# EAGLE board WaterProbe_2 (EAGLE 9.1.3)
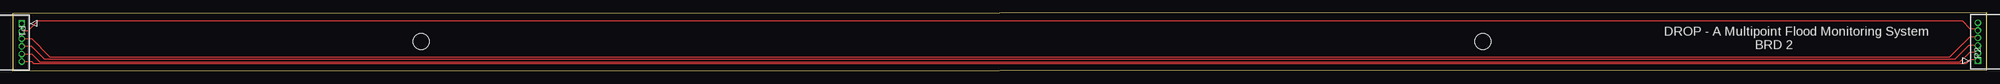
[diagram p0: board, top side]

Size 386.74 x 11.46 mm. Coordinates in mm from the lower left corner, seen from the top.
Outline: 0,0 386.74,0.21 386.74,11.46 0,11.25 0,0
Copper layers (1*16): Top 0.035mm / dielectric 1.5mm / Bottom 0.035mm
Design rules "default": minimum track width 6mil, minimum drill 0.35mm, track to track 6mil, track to pad 6mil, pad to pad 6mil, via to via 6mil, smd to smd 6mil, copper to edge 40mil, drill to drill 6mil, minimum pad ring 10mil, minimum via ring 8mil, stop-mask expansion 4mil, vias tented up to drill 0mil, thermal gap 10mil
Holes 3.2 mm at 80,5.75 288,5.75

## Footprints (pad centres in the part's own frame; a part is rotated, then mirrored left to right if it is on the bottom)
S6B-ZR = drill 0.762 pad 1.27 square: 1 -7.493,0 | drill 0.762 pad 1.27: 2 -5.994,0; 3 -4.496,0; 4 -2.997,0; 5 -1.499,0; 6 0,0

## Placement (x,y rotation side)
P1  6PINJSTS6B-ZR(LF)(SN)  [S6B-ZR]  1.76,1.83 270 top
P2  6PINJSTS6B-ZR(LF)(SN)  [S6B-ZR]  385.01,9.47 90 top

## Library data of the parts
P1 P2 = DROP 6pin JST; MANUFACTURER_PART_NUMBER: S6BZRLFSN; VENDOR: JST

## Nets
N$1: P1.6 P2.1
N$2: P1.5 P2.2
N$3: P1.4 P2.3
N$4: P1.3 P2.4
N$5: P1.2 P2.5

## Tracks (layer width: path | path; a pad name or v marks a point on that pad's centre or on a via)
N$1
  Top 0.152: P1.6 3.67,1.83 4.05,1.45 382.69,1.45 383.5,2.25 384.74,2.25 P2.1
N$2
  Top 0.152: P1.5 3.67,3.33 5.25,1.75 381.5,1.75 383.5,3.75 384.74,3.75 P2.2
N$3
  Top 0.152: P2.3 383.22,4.97 380.5,2.25 6.25,2.25 3.67,4.83 P1.4
N$4
  Top 0.152: P1.3 3.67,6.33 7.25,2.75 379.5,2.75 383.5,6.75 384.73,6.75 P2.4
N$5
  Top 0.152: P1.2 2.93,7.82 4.85,9.75 382,9.75 383.5,8.25 384.73,8.25 P2.5

## Text on the board
tNames: DROP - A Multipoint Flood Monitoring System / BRD 2